# Altium PCB imu_sense.PcbDoc (part 1 of 2)
Units mil, origin at the board's own origin, x right, y up, seen from the top; angles counter-clockwise.
Board outline 2000 x 2000 mil, 2 copper layers (Top Layer, Bottom Layer); 188 components, 109 nets, 611 pads, 219 vias.
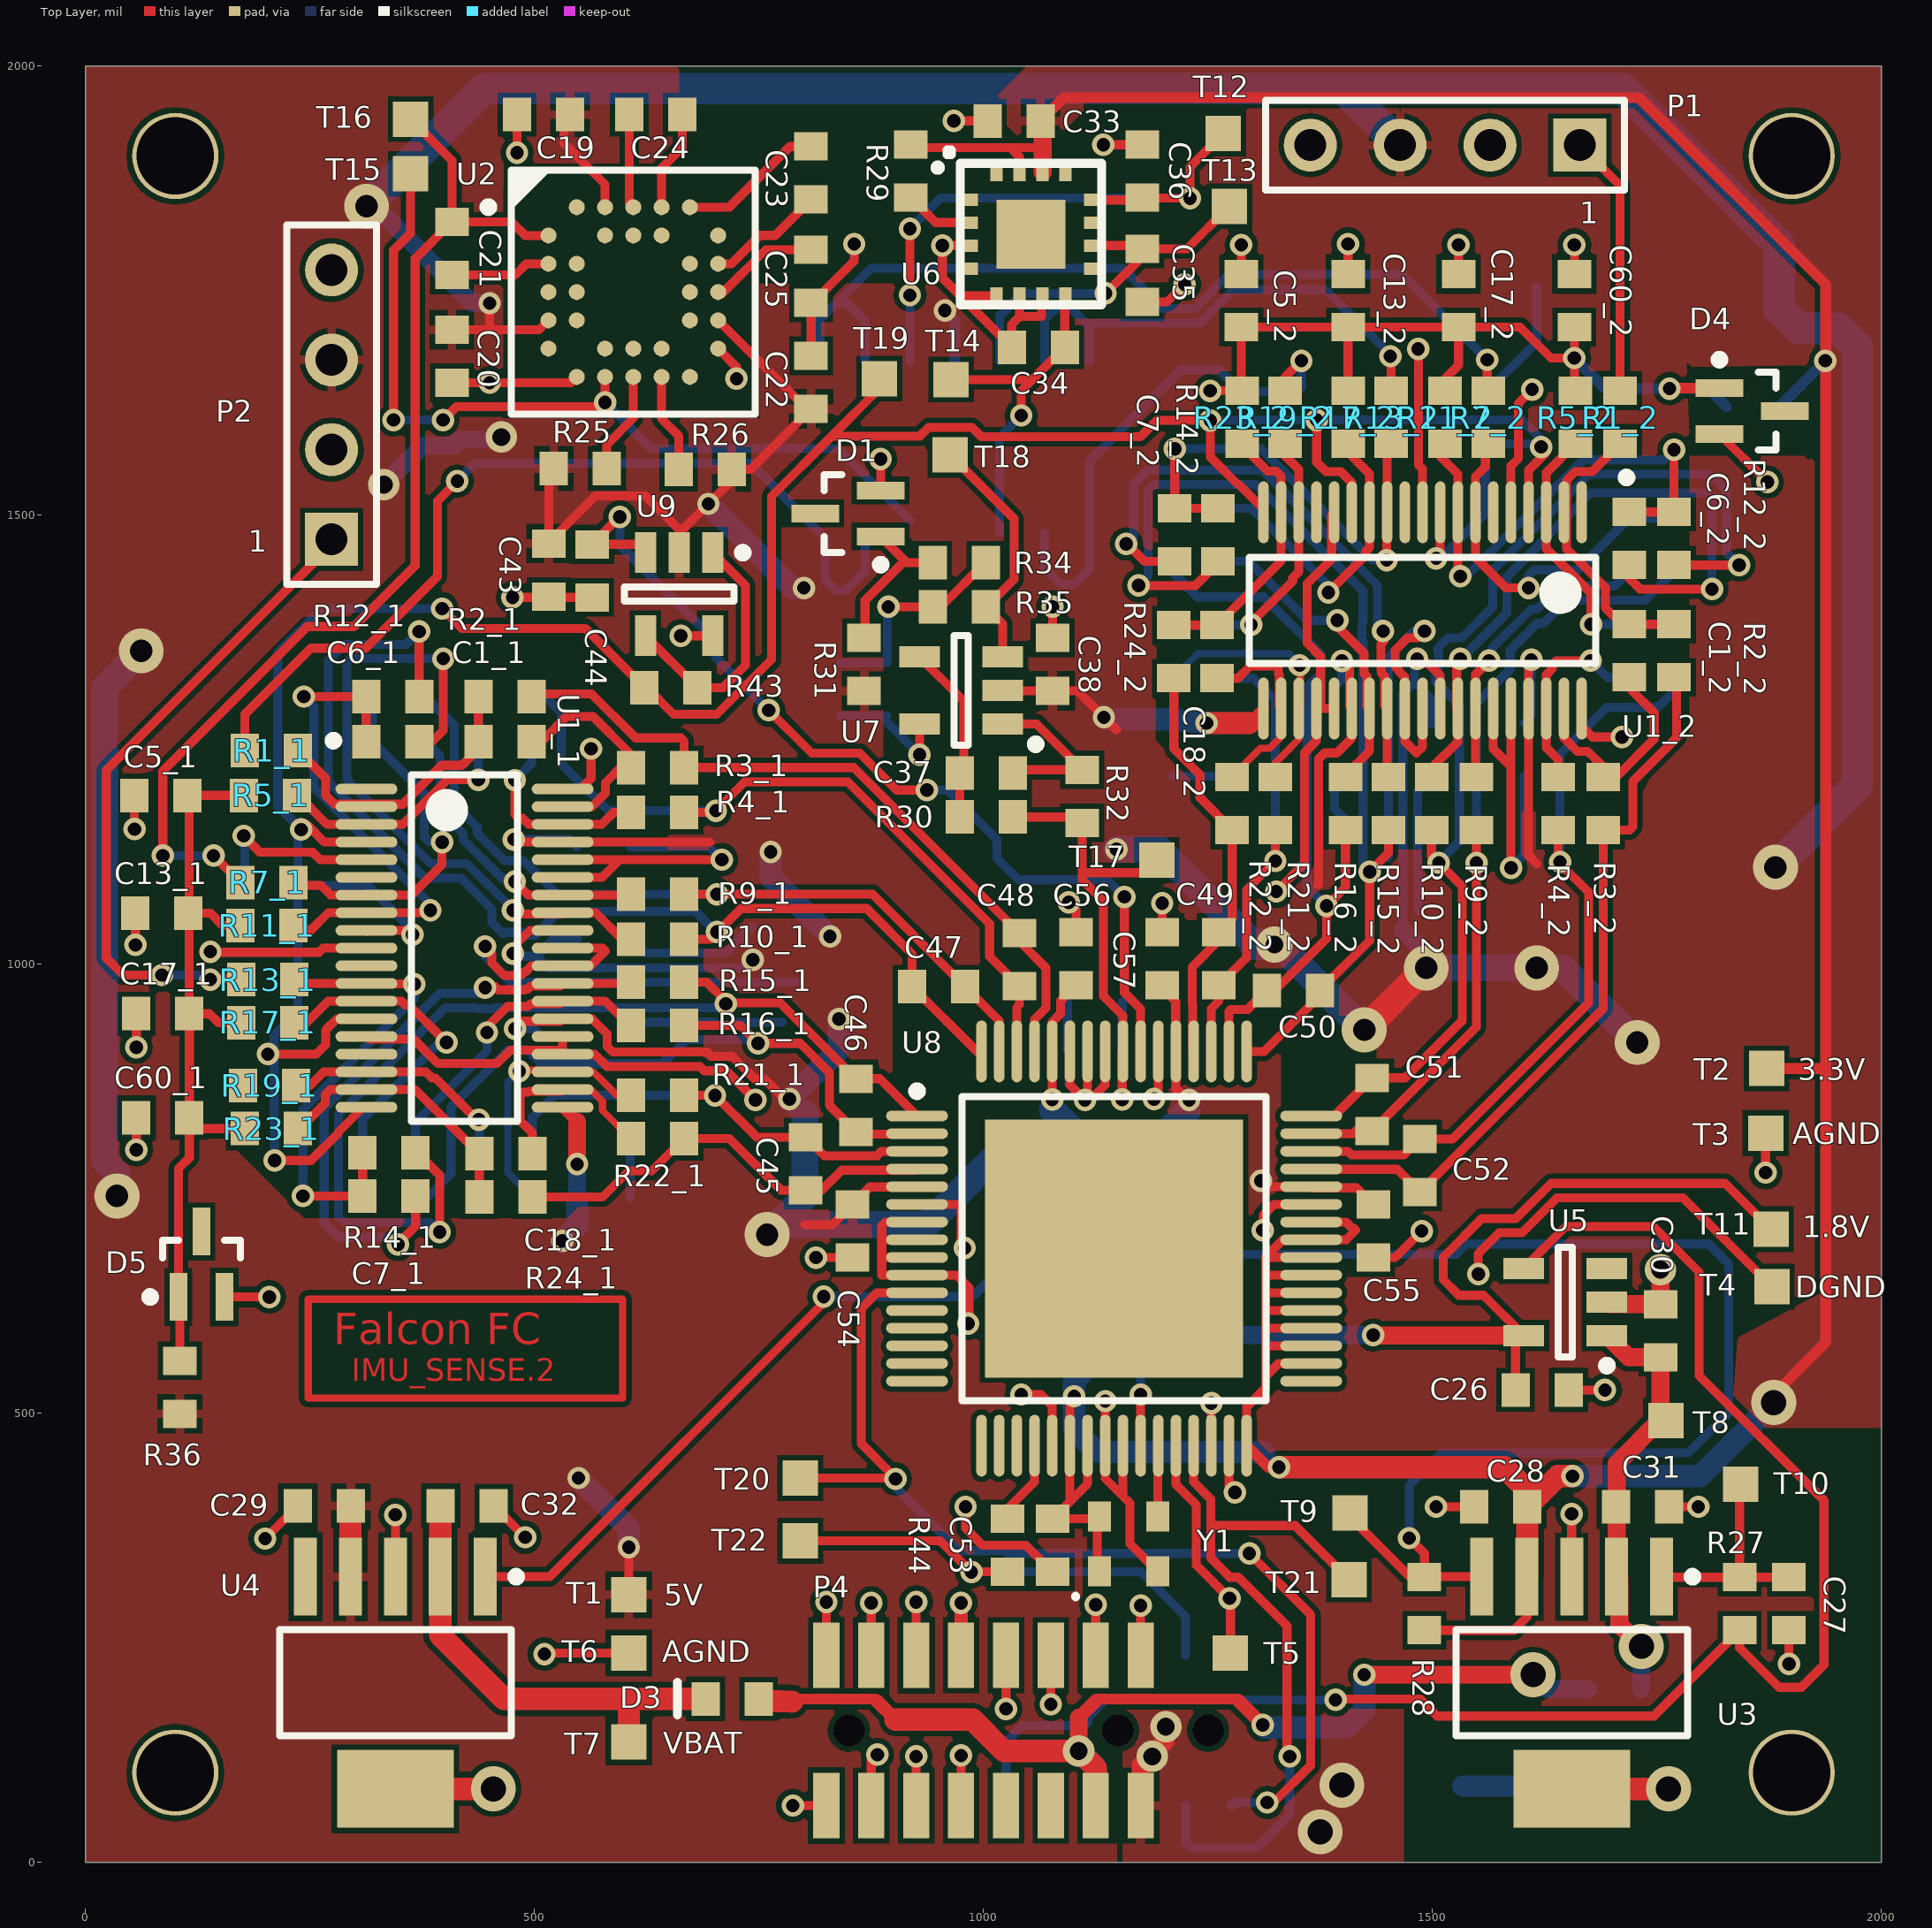
[diagram p0: Top Layer view]
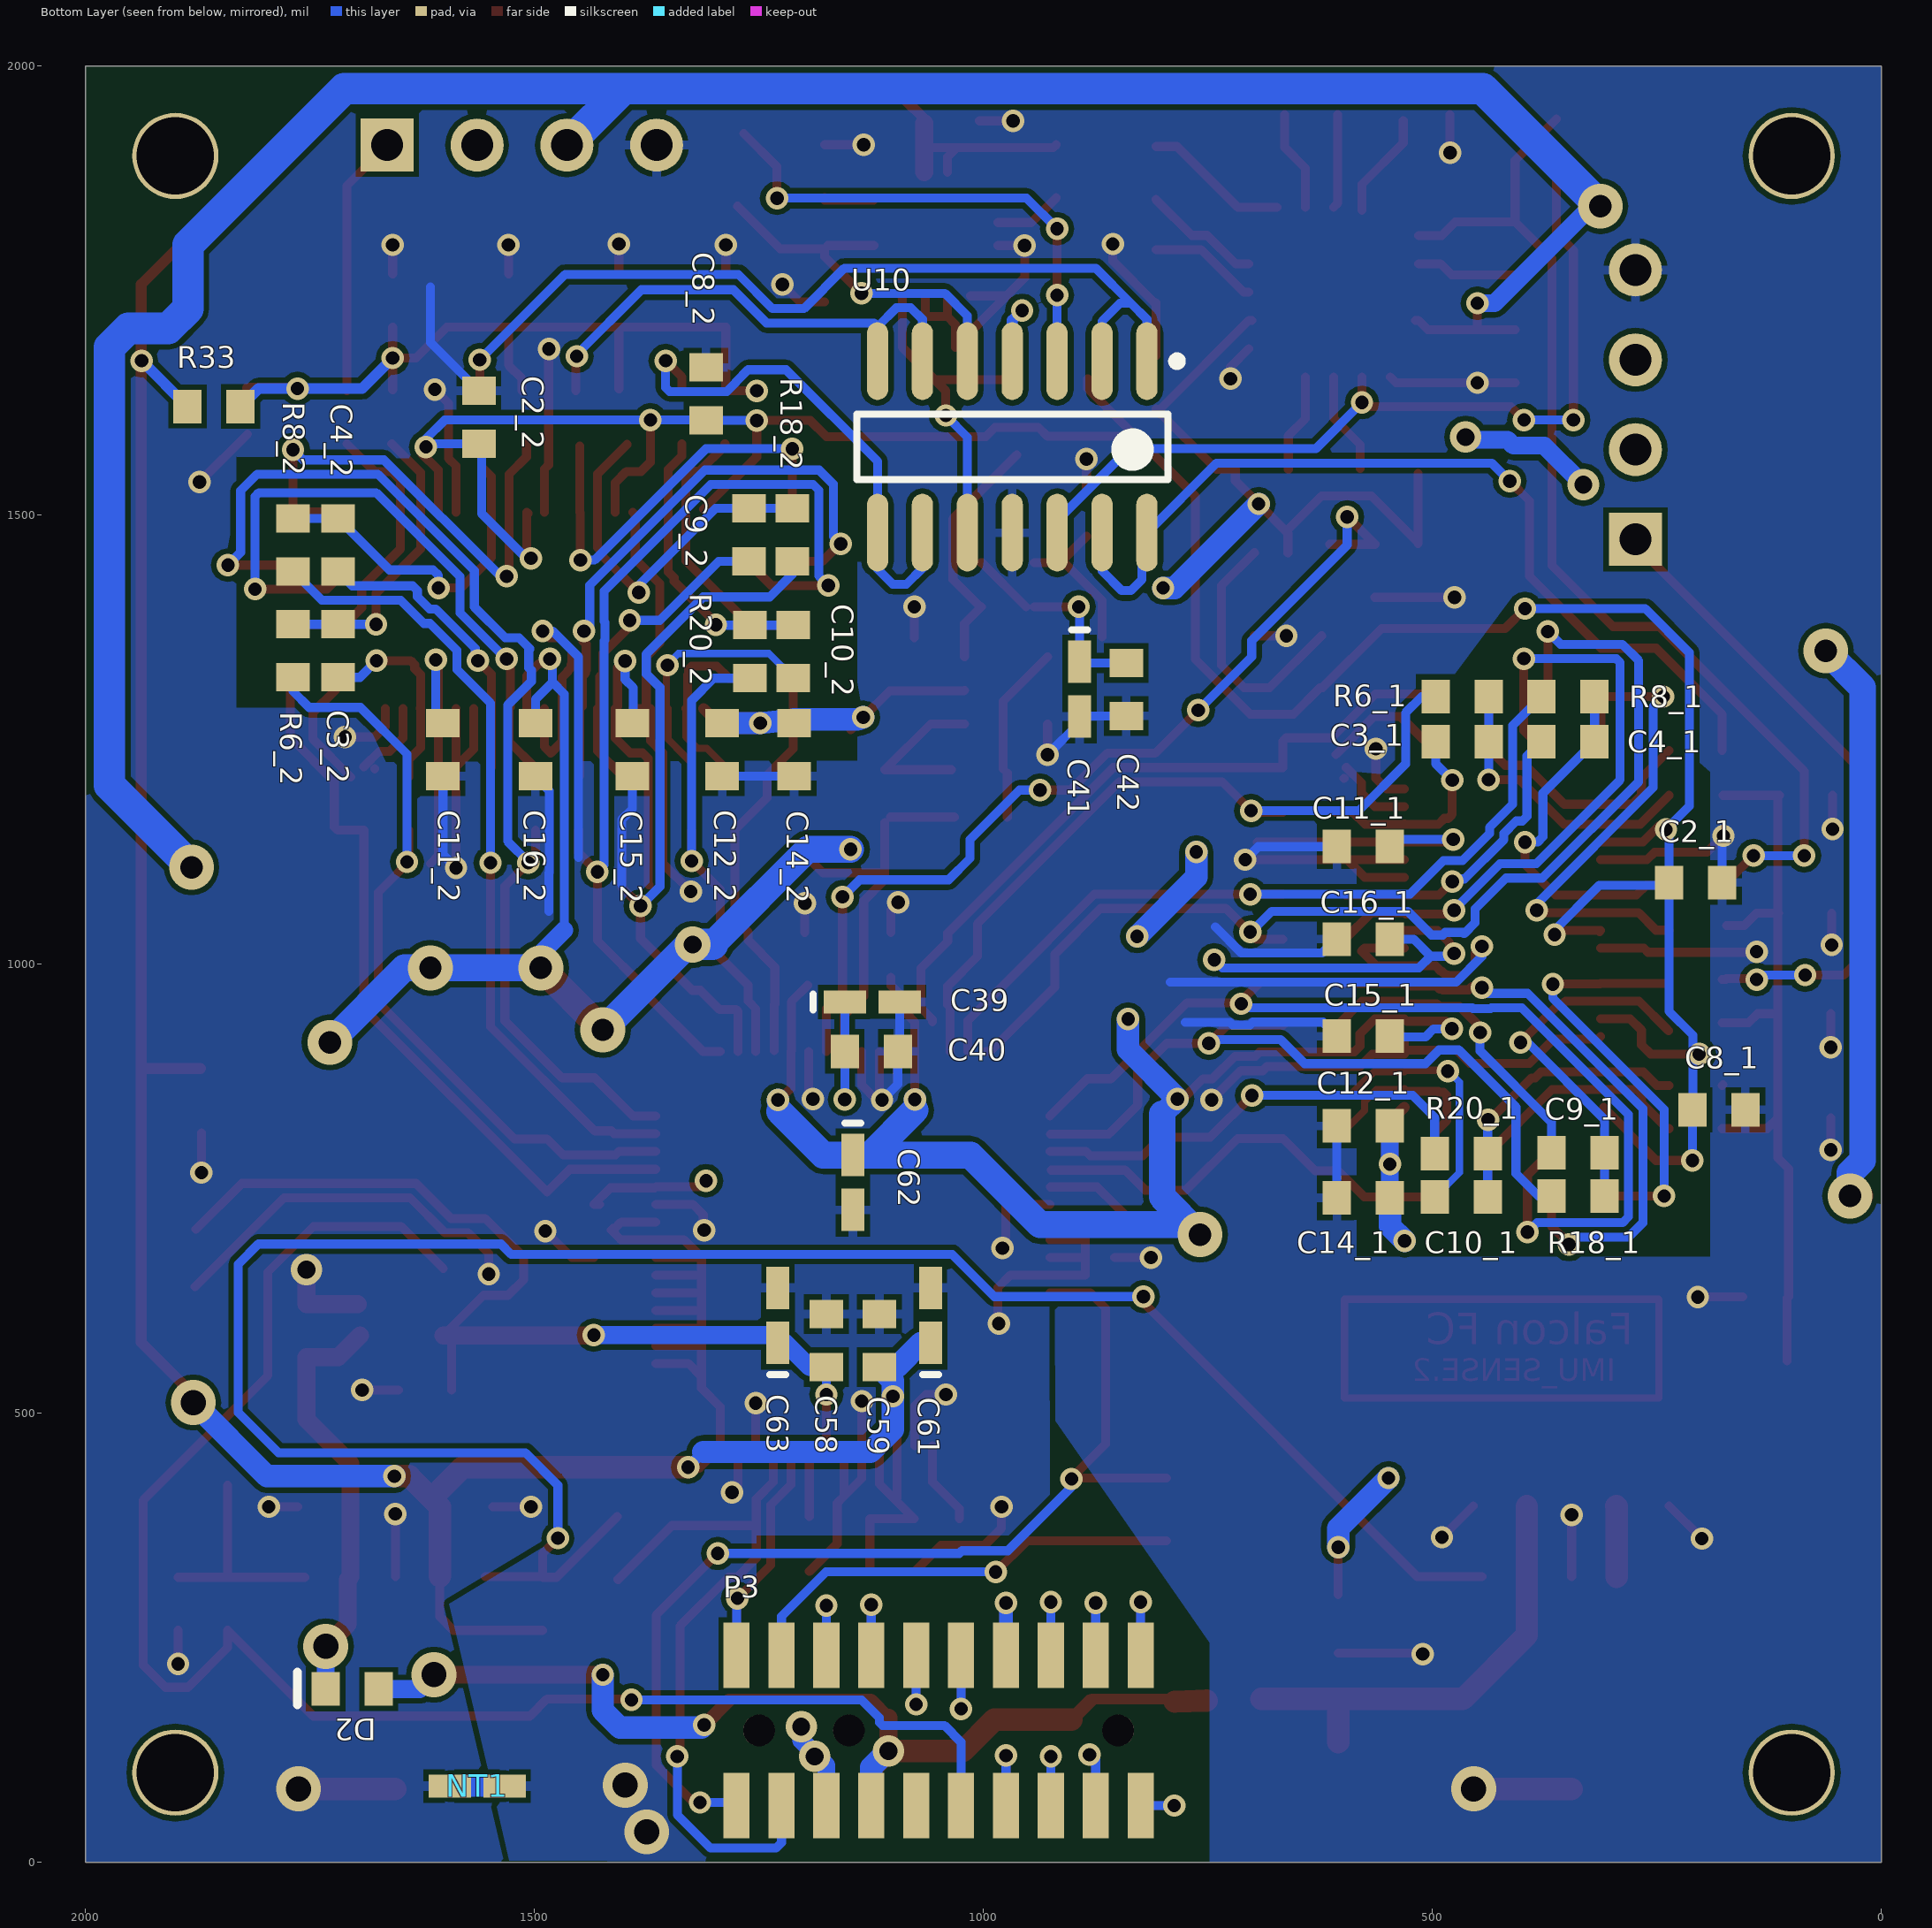
[diagram p1: Bottom Layer view, seen from below]

## Layer stack, top to bottom
Top Layer: signal copper 1.4
Dielectric: dielectric 12.6, FR-4, Dk 4.8
Bottom Layer: signal copper 1.4

## Board outline
0,0 2000,0 2000,2000 0,2000

## Design rules (kind name [scope] priority, off if disabled: settings)
Clearance [All] p1: gap=6
HoleSize [All] p1: absolutevalues=TRUE maxlimit=100 minlimit=15 maxpercent=80.000 minpercent=20.000
HoleToHoleClearance [All] p1: gap=6 allowstackedmicrovias=TRUE
PolygonConnect PolygonConnect_1 [IsVia] p1: connectstyle=Direct reliefconductorwidth=10 reliefentries=4 polygonreliefangle="90 Angle"
PolygonConnect [All] p2: connectstyle=Relief reliefconductorwidth=10 reliefentries=4 polygonreliefangle="90 Angle"
RoomDefinition 2 [InComponentClass('2')] p1: confinementstyle=ConfineIn formatcopy=TRUE lockcomponents=FALSE outline 1886,1788 1085,1788 1085,795 1886,795
RoomDefinition 1 [InComponentClass('1')] p2: confinementstyle=ConfineIn formatcopy=TRUE lockcomponents=FALSE outline 34,1412 34,609 1021,609 1021,1412
RoomDefinition imu_sense [InComponentClass('imu_sense')] p3: confinementstyle=ConfineIn formatcopy=TRUE lockcomponents=FALSE outline 0,0 2000,0 2000,2000 0,2000
RoomDefinition U_gyro [InComponentClass('U_gyro')] p4: confinementstyle=ConfineIn formatcopy=TRUE lockcomponents=TRUE outline 353,1433 904,1433 904,1992 353,1992
RoutingVias [All] p1: holewidth=15 width=25 viastyle="Through Hole" minholewidth=15 minwidth=25 maxholewidth=100 maxwidth=200
SilkToSilkClearance [All] p1: silktosilkclearance=1
SilkscreenOverComponentPads [All] p1: minsilkscreentomaskgap=1
SolderMaskExpansion SolderMaskExpansion_1 [IsVia] p1: expansion=-300
SolderMaskExpansion [All] p2: expansion=4
Width [All] p1: maxlimit=100 minlimit=6 preferedwidth=10
24 further rules are at their usual default settings.

## Classes and differential pairs
net class FLTR_IN_D[1..2]: FLTR_IN_D1 FLTR_IN_D2
net class FLTR_IN_C[1..2]: FLTR_IN_C1 FLTR_IN_C2
channel class differential_op_amps: 1 2
component class 2: C1_2 C2_2 C3_2 C4_2 C5_2 C6_2 C7_2 C8_2 C9_2 C10_2 C11_2 C12_2 C13_2 C14_2 C15_2 C16_2 C17_2 C18_2 C60_2 R1_2 R2_2 R3_2 R4_2 R5_2 R6_2 R7_2 R8_2 R9_2 R10_2 R11_2 R12_2 R13_2 R14_2 R15_2 R16_2 R17_2 R18_2 R19_2 R20_2 R21_2 R22_2 R23_2 R24_2 U1_2
component class 1: C1_1 C2_1 C3_1 C4_1 C5_1 C6_1 C7_1 C8_1 C9_1 C10_1 C11_1 C12_1 C13_1 C14_1 C15_1 C16_1 C17_1 C18_1 C60_1 R1_1 R2_1 R3_1 R4_1 R5_1 R6_1 R7_1 R8_1 R9_1 R10_1 R11_1 R12_1 R13_1 R14_1 R15_1 R16_1 R17_1 R18_1 R19_1 R20_1 R21_1 R22_1 R23_1 R24_1 U1_1
component class imu_sense: C26 C27 C28 C29 C30 C31 C32 C33 C34 C35 C36 C37 C38 C39 C40 C41 C42 C43 C44 C45 C46 C47 C48 C49 C50 C51 C52 C53 C54 C55 C56 C57 C58 C59 C61 C62 C63 D1 D2 D3 D4 D5 NT1 P1 P2 P3 P4 R27 R28 R29 R30 R31 R32 R33 R34 R35 R36 R43 R44 T1 T2 T3 T4 T5 T6 T7 T8 T9 T10 T11 T12 T13 T14 T15 T16 T17 T18 T19 T20 T21 T22 T? U3 U4 U5 U6 U7 U8 U9 U10 Y1
component class U_gyro: C19 C20 C21 C22 C23 C24 C25 R25 R26 U2
net class FLTR_IN_A[1..2]: FLTR_IN_A1 FLTR_IN_A2
net class FLTR_A_N[1..2]: FLTR_A_N1 FLTR_A_N2
net class FLTR_B_N[1..2]: FLTR_B_N1 FLTR_B_N2
net class FLTR_C_N[1..2]: FLTR_C_N1 FLTR_C_N2
net class FLTR_D_N[1..2]: FLTR_D_N1 FLTR_D_N2
net class FLTR_A_P[1..2]: FLTR_A_P1 FLTR_A_P2
net class FLTR_B_P[1..2]: FLTR_B_P1 FLTR_B_P2
net class FLTR_C_P[1..2]: FLTR_C_P1 FLTR_C_P2
net class FLTR_D_P[1..2]: FLTR_D_P1 FLTR_D_P2
net class FLTR_IN_B[1..2]: FLTR_IN_B1 FLTR_IN_B2

## Components (designator, comment, footprint, x,y, rotation, side; value= is the part's Value field where it differs from the comment)
C1_1 "Capacitor" "0603 (1608)" 467,1248 r180 top (schematic designator C1)
C1_2 "Capacitor" "0603 (1608)" 1719,1349 r90 top (schematic designator C1)
C2_1 "Capacitor" "0603 (1608)" 207,1091 r0 bottom (schematic designator C2)
C2_2 "Capacitor" "0603 (1608)" 1562,1609 r270 bottom (schematic designator C2)
C3_1 "Capacitor" "0603 (1608)" 467,1248 r180 bottom (schematic designator C3)
C3_2 "Capacitor" "0603 (1608)" 1719,1349 r90 bottom (schematic designator C3)
C4_1 "Capacitor" "0603 (1608)" 349,1248 r180 bottom (schematic designator C4)
C4_2 "Capacitor" "0603 (1608)" 1719,1467 r90 bottom (schematic designator C4)
C5_1 "Capacitor" "0603 (1608)" 84,1188 r0 top (schematic designator C5)
C5_2 "Capacitor" "0603 (1608)" 1287,1739 r270 top (schematic designator C5)
C6_1 "Capacitor" "0603 (1608)" 342,1248 r180 top (schematic designator C6)
C6_2 "Capacitor" "0603 (1608)" 1719,1474 r90 top (schematic designator C6)
C7_1 "Capacitor" "0603 (1608)" 338,742 r180 top (schematic designator C7)
C7_2 "Capacitor" "0603 (1608)" 1213,1478 r90 top (schematic designator C7)
C8_1 "Capacitor" "0603 (1608)" 181,838 r0 bottom (schematic designator C8)
C8_2 "Capacitor" "0603 (1608)" 1309,1635 r270 bottom (schematic designator C8)
C9_1 "Capacitor" "0603 (1608)" 338,790 r180 bottom (schematic designator C9)
C9_2 "Capacitor" "0603 (1608)" 1261,1478 r90 bottom (schematic designator C9)
C10_1 "Capacitor" "0603 (1608)" 468,741 r180 bottom (schematic designator C10)
C10_2 "Capacitor" "0603 (1608)" 1212,1348 r90 bottom (schematic designator C10)
C11_1 "Capacitor" "0603 (1608)" 577,1131 r0 bottom (schematic designator C11)
C11_2 "Capacitor" "0603 (1608)" 1602,1239 r270 bottom (schematic designator C11)
C12_1 "Capacitor" "0603 (1608)" 577,820 r0 bottom (schematic designator C12)
C12_2 "Capacitor" "0603 (1608)" 1291,1239 r270 bottom (schematic designator C12)
C13_1 "Capacitor" "0603 (1608)" 85,1057 r180 top (schematic designator C13)
C13_2 "Capacitor" "0603 (1608)" 1406,1739 r90 top (schematic designator C13)
C14_1 "Capacitor" "0603 (1608)" 577,740 r0 bottom (schematic designator C14)
C14_2 "Capacitor" "0603 (1608)" 1211,1239 r270 bottom (schematic designator C14)
C15_1 "Capacitor" "0603 (1608)" 577,920 r0 bottom (schematic designator C15)
C15_2 "Capacitor" "0603 (1608)" 1391,1239 r270 bottom (schematic designator C15)
C16_1 "Capacitor" "0603 (1608)" 577,1028 r0 bottom (schematic designator C16)
C16_2 "Capacitor" "0603 (1608)" 1499,1239 r270 bottom (schematic designator C16)
C17_1 "Capacitor" "0603 (1608)" 86,945 r180 top (schematic designator C17)
C17_2 "Capacitor" "0603 (1608)" 1529,1739 r90 top (schematic designator C17)
C18_1 "Capacitor" "0603 (1608)" 468,789 r180 top (schematic designator C18)
C18_2 "Capacitor" "0603 (1608)" 1260,1348 r90 top (schematic designator C18)
C19 "Capacitor" "0603 (1608)" 510,1946 r180 top
C20 "Capacitor" "0603 (1608)" 408,1677 r270 top
C21 "Capacitor" "0603 (1608)" 408,1797 r90 top
C22 "Capacitor" "0603 (1608)" 808,1648 r90 top
C23 "Capacitor" "0603 (1608)" 808,1881 r270 top
C24 "Capacitor" "0603 (1608)" 635,1946 r0 top
C25 "Capacitor" "0603 (1608)" 808,1766 r270 top
C26 "1uF" "0603 (1608)" 1622,526 r0 top
C27 "Capacitor" "0603 (1608)" 1897,288 r270 top
C28 "10uF" "0603 (1608)" 1576,396 r180 top
C29 "10uF" "0603 (1608)" 266,397 r180 top
C30 "1uF" "0603 (1608)" 1754,592 r90 top
C31 "Capacitor" "0603 (1608)" 1734,396 r0 top
C32 "Capacitor" "0603 (1608)" 425,397 r0 top
C33 "Capacitor" "0603 (1608)" 1034,1939 r180 top
C34 "10nF" "0603 (1608)" 1061,1687 r0 top
C35 "10nF" "0603 (1608)" 1177,1767 r90 top
C36 "10nF" "0603 (1608)" 1177,1883 r270 top
C37 "Capacitor" "0603 (1608)" 1003,1213 r0 top
C38 "10nF" "0603 (1608)" 1077,1334 r270 top
C39 "tant" "CAP-POL 0603(1608)" 1124,958 r180 bottom
C40 "Capacitor" "0603 (1608)" 1125,903 r180 bottom
C41 "tant" "CAP-POL 0603(1608)" 893,1306.49 r270 bottom
C42 "Capacitor" "0603 (1608)" 841,1306 r270 bottom
C43 "10nF" "0603 (1608)" 516,1439 r90 top
C44 "Capacitor" "0603 (1608)" 564,1438 r270 top
C45 "Capacitor" "0603 (1608)" 802,778 r270 top
C46 "Capacitor" "0603 (1608)" 858,843 r270 top
C47 "Capacitor" "0603 (1608)" 950,975 r180 top
C48 "Capacitor" "0603 (1608)" 1040,1005 r270 top
C49 "Capacitor" "0603 (1608)" 1262,1006 r90 top
C50 "Capacitor" "0603 (1608)" 1345,971 r180 top
C51 "Capacitor" "0603 (1608)" 1433,844 r90 top
C52 "Capacitor" "0603 (1608)" 1486,776 r90 top
C53 "10nF" "0603 (1608)" 1077,353 r90 top
C54 "Capacitor" "0603 (1608)" 854,703 r270 top
C55 "Capacitor" "0603 (1608)" 1434,703 r270 top
C56 "Capacitor" "0603 (1608)" 1103,1006 r90 top
C57 "Capacitor" "0603 (1608)" 1199,1006 r90 top
C58 "Capacitor" "0603 (1608)" 1175,581 r90 bottom
C59 "Capacitor" "0603 (1608)" 1116,581 r90 bottom
C60_1 "Capacitor" "0603 (1608)" 86,829 r180 top (schematic designator C60)
C60_2 "Capacitor" "0603 (1608)" 1658,1739 r90 top (schematic designator C60)
C61 "tant" "CAP-POL 0603(1608)" 1059,609 r90 bottom
C62 "tant" "CAP-POL 0603(1608)" 1145.42,757 r270 bottom
C63 "tant" "CAP-POL 0603(1608)" 1229,609 r90 bottom
D1 "2.5V Ref" SC-70 849,1502 r180 top
D2 "Diode" "0603(1608) diode - line on pin2" 1703,193 r0 bottom
D3 "Diode" "0603(1608) diode - line on pin2" 720,182 r180 top
D4 "2.5V Ref" SC-70 1856,1616 r0 top
D5 "2.5V Ref" SC-70 129,666 r90 top
NT1 "Net Tie" NET_TIE 1564,85 r0 bottom net-tie
P1 "Header 4" "gyro mount" 1506,1914 r90 top
P2 "Header 4" "gyro mount" 276,1631 r0 top
P3 "MHDR2X10" S9013E-10-ND 1050,147 r0 bottom locked
P4 "2x8smd0.5male" "Header, right hole" 1000,147 r0 top locked
R1_1 "931 1%" "0603 (1608)" 207,1238 r0 top (schematic designator R1)
R1_2 "931 1%" "0603 (1608)" 1709,1609 r270 top (schematic designator R1)
R2_1 "931 1%" "0603 (1608)" 467,1298 r0 top (schematic designator R2)
R2_2 "931 1%" "0603 (1608)" 1769,1349 r270 top (schematic designator R2)
R3_1 "931 1%" "0603 (1608)" 637,1219 r0 top (schematic designator R3)
R3_2 "931 1%" "0603 (1608)" 1690,1179 r270 top (schematic designator R3)
R4_1 "931 1%" "0603 (1608)" 637,1169 r0 top (schematic designator R4)
R4_2 "931 1%" "0603 (1608)" 1640,1179 r270 top (schematic designator R4)
R5_1 "931 1%" "0603 (1608)" 206,1188 r0 top (schematic designator R5)
R5_2 "931 1%" "0603 (1608)" 1659,1609 r270 top (schematic designator R5)
R6_1 "931 1%" "0603 (1608)" 467,1298 r0 bottom (schematic designator R6)
R6_2 "931 1%" "0603 (1608)" 1769,1349 r270 bottom (schematic designator R6)
R7_1 "931 1%" "0603 (1608)" 202,1091 r0 top (schematic designator R7)
R7_2 "931 1%" "0603 (1608)" 1562,1609 r270 top (schematic designator R7)
R8_1 "931 1%" "0603 (1608)" 349,1298 r0 bottom (schematic designator R8)
R8_2 "931 1%" "0603 (1608)" 1769,1467 r270 bottom (schematic designator R8)
R9_1 "931 1%" "0603 (1608)" 637,1078 r0 top (schematic designator R9)
R9_2 "931 1%" "0603 (1608)" 1549,1179 r270 top (schematic designator R9)
R10_1 "931 1%" "0603 (1608)" 637,1028 r0 top (schematic designator R10)
R10_2 "931 1%" "0603 (1608)" 1499,1179 r270 top (schematic designator R10)
R11_1 "931 1%" "0603 (1608)" 202,1043 r0 top (schematic designator R11)
R11_2 "931 1%" "0603 (1608)" 1514,1609 r270 top (schematic designator R11)
R12_1 "931 1%" "0603 (1608)" 342,1298 r0 top (schematic designator R12)
R12_2 "931 1%" "0603 (1608)" 1769,1474 r270 top (schematic designator R12)
R13_1 "931 1%" "0603 (1608)" 203,983 r0 top (schematic designator R13)
R13_2 "931 1%" "0603 (1608)" 1454,1609 r270 top (schematic designator R13)
R14_1 "931 1%" "0603 (1608)" 338,790 r0 top (schematic designator R14)
R14_2 "931 1%" "0603 (1608)" 1261,1478 r270 top (schematic designator R14)
R15_1 "931 1%" "0603 (1608)" 637,980 r0 top (schematic designator R15)
R15_2 "931 1%" "0603 (1608)" 1451,1179 r270 top (schematic designator R15)
R16_1 "931 1%" "0603 (1608)" 637,932 r0 top (schematic designator R16)
R16_2 "931 1%" "0603 (1608)" 1403,1179 r270 top (schematic designator R16)
R17_1 "931 1%" "0603 (1608)" 203,935 r0 top (schematic designator R17)
R17_2 "931 1%" "0603 (1608)" 1406,1609 r270 top (schematic designator R17)
R18_1 "931 1%" "0603 (1608)" 338,742 r0 bottom (schematic designator R18)
R18_2 "931 1%" "0603 (1608)" 1213,1478 r270 bottom (schematic designator R18)
R19_1 "931 1%" "0603 (1608)" 205,865 r0 top (schematic designator R19)
R19_2 "931 1%" "0603 (1608)" 1336,1609 r270 top (schematic designator R19)
R20_1 "931 1%" "0603 (1608)" 468,789 r0 bottom (schematic designator R20)
R20_2 "931 1%" "0603 (1608)" 1260,1348 r270 bottom (schematic designator R20)
R21_1 "931 1%" "0603 (1608)" 637,854 r0 top (schematic designator R21)
R21_2 "931 1%" "0603 (1608)" 1325,1179 r270 top (schematic designator R21)
R22_1 "931 1%" "0603 (1608)" 637,806 r0 top (schematic designator R22)
R22_2 "931 1%" "0603 (1608)" 1277,1179 r270 top (schematic designator R22)
R23_1 "931 1%" "0603 (1608)" 207,817 r0 top (schematic designator R23)
R23_2 "931 1%" "0603 (1608)" 1288,1609 r270 top (schematic designator R23)
R24_1 "931 1%" "0603 (1608)" 468,741 r0 top (schematic designator R24)
R24_2 "931 1%" "0603 (1608)" 1212,1348 r270 top (schematic designator R24)
R25 "ST Jumper" "0603 (1608)" 551,1552 r180 top
R26 "ST Jumper" "0603 (1608)" 690,1551 r0 top
R27 "200" "0603 (1608)" 1842,288 r90 top
R28 "20K" "0603 (1608)" 1491,288 r90 top
R29 "ST Jumper" "0603 (1608)" 919,1883 r270 top
R30 "1K" "0603 (1608)" 1003,1164 r0 top
R31 "20K" "0603 (1608)" 867,1334 r270 top
R32 "100" "0603 (1608)" 1110,1187 r270 top
R33 "200" "0603 (1608)" 1857,1621 r180 bottom
R34 "1K" "0603 (1608)" 973,1447 r0 top
R35 "100" "0603 (1608)" 973,1398 r0 top
R36 "200" "0603 (1608)" 105,529 r90 top
R43 "100" "0603 (1608)" 652,1308 r180 top
R44 "931 1%" "0603 (1608)" 1027,353 r270 top
T1 "TEST_PAD" TEST_PAD 605,298 r0 top
T2 "TEST_PAD" TEST_PAD 1872,884 r0 top
T3 "AGND" TEST_PAD 1871,812 r0 top
T4 "TEST_PAD" TEST_PAD 1878,641 r0 top
T5 "TEST_PAD" TEST_PAD 1275,233 r0 top
T6 "TEST_PAD" TEST_PAD 605,233 r0 top
T7 "VBAT" TEST_PAD 605,134 r0 top
T8 "TEST_PAD" TEST_PAD 1760,492 r0 top
T9 "TEST_PAD" TEST_PAD 1408,389 r0 top
T10 "TEST_PAD" TEST_PAD 1843,421 r90 top
T11 "TEST_PAD" TEST_PAD 1877,705 r90 top
T12 "" TEST_PAD 1267,1925 r90 top
T13 "" TEST_PAD 1274,1844 r90 top
T14 "" TEST_PAD 964,1651 r90 top
T15 "" TEST_PAD 362,1880 r90 top
T16 "" TEST_PAD 362,1941 r90 top
T17 "" TEST_PAD 1193,1116 r90 top
T18 "" TEST_PAD 963,1567 r90 top
T19 "" TEST_PAD 884,1652 r90 top
T20 "" TEST_PAD 796,428 r90 top
T21 "" TEST_PAD 1407,315 r90 top
T22 "TEST_PAD" TEST_PAD 796,358 r90 top
U1_1 "THS4524" TSSOP-38 422,1018 r0 top (schematic designator U1)
U1_2 "THS4524" TSSOP-38 1489,1394 r270 top (schematic designator U1)
U2 "ADXRS620" BGA_AXDR 610.01,1748.5 r0 top
U3 "3.3V Reg MCP1791T-3302E" "SOT223 - 5 leads + tab" 1655,200 r270 top locked
U4 "5V Reg - MCP1791T-5002E" "SOT223 - 5 leads + tab" 345,200 r270 top locked
U5 "1.8V Reg MCP1804" "SOT23-5 - MCP1804T" 1648,624 r180 top
U6 "ADXL325" LFCSP_LQ_AXDL 1053,1813 r0 top
U7 "TLV2731" "SOT23-5 Ti Op Amp" 975,1305 r180 top
U8 "ADS1178/1278" S-PQFP-G64 1145.42,683.49 r0 top
U9 "TLV2731" "SOT23-5 Ti Op Amp" 661,1412 r270 top
U10 "OPA4348" TSSOP-14 968,1576 r270 bottom
Y1 "OSCILLATOR" "ABRACON Oscillator" 1129,323.98 r0 top

## Footprints (in the part's own frame and the unit in brackets; to place one, negate y for a bottom-side part, rotate by r counter-clockwise, add the part's x,y. Pads: shape width x height; smd on the part's side, far side on the other; paste and mask are expansions set on the pad)
"0603 (1608)" [mm] "Chip 2-Leads 0603 (1608)"
  rect 0.8x0.95 smd mask+0: 1(-0.75,0) 2(0.75,0)
  body extent -0.77,-0.43 0.77,0.43, height 0.55
"0603(1608) diode - line on pin2" [mm]
  rect 0.8x0.95 smd mask+0: 1(-0.75,0) 2(0.75,0)
  silkscreen extent 1.55,-0.48 1.55,0.45, body extent -0.77,-0.43 0.77,0.43, height 0.55
"ABRACON Oscillator" [mm]
  rect 0.65x0.85 smd: 1(0,0) 2(1.65,0) 3(1.65,1.55) 4(0,1.55)
  silkscreen extent -0.68,-0.71 -0.67,-0.7, body extent -0.48,-0.36 2.2,1.91, height 0.85
BGA_AXDR [mm] "From AXDRS622 Datasheet"
  round 0.45 smd: A2(-1.6,2.4) A3(-0.8,2.4) A4(0,2.4) A5(0.8,2.4) A6(1.6,2.4) B1(-2.4,1.6) B3(-0.8,1.6) B4(0,1.6) B5(0.8,1.6) B7(2.4,1.6) C1(-2.4,0.8) C2(-1.6,0.8) C6(1.6,0.8) C7(2.4,0.8) D1(-2.4,0) D2(-1.6,0) D6(1.6,0) D7(2.4,0) E1(-2.4,-0.8) E2(-1.6,-0.8) E6(1.6,-0.8) E7(2.4,-0.8) F1(-2.4,-1.6) F3(-0.8,-1.6) F4(0,-1.6) F5(0.8,-1.6) F7(2.4,-1.6) G2(-1.6,-2.4) G3(-0.8,-2.4) G4(0,-2.4) G5(0.8,-2.4) G6(1.6,-2.4)
  silkscreen extent -4.22,-3.45 3.45,3.45, body extent -3.45,-3.45 3.45,3.45, height 3.8
"CAP-POL 0603(1608)" [mm] "Molded Capacitor, 2-Leads, Body 1.6x0.8mm, IPC Medium Density"
  rect 1.2x0.65 smd: 1(-0.775,0) 2(0.775,0)
  silkscreen extent -1.67,-0.22 -1.67,0.22, body extent -0.85,-0.48 0.85,0.48, height 0.9
"gyro mount" [mm] "100 mil header for mounting gyro board to imu"
  rect 1.5x1.5 hole 0.9 mask+0.1: 1(-0.051,-4.013)
  round 1.5 hole 0.9 mask+0.1: 2(-0.051,-1.473) 3(-0.051,1.067) 4(-0.051,3.607)
  silkscreen extent -1.32,-5.28 1.22,4.88, body extent -6.28,-6.1 1.12,5.75, height 13.27
"Header, right hole" [mm]
  round 0.889 hole 0.9 unplated: 0(3.81,0)
  rect 0.74x1.85 smd: 1(-4.445,2.125) 2(-4.445,-2.125) 3(-3.175,2.125) 4(-3.175,-2.125) 5(-1.905,2.125) 6(-1.905,-2.125) 7(-0.635,2.125) 8(-0.635,-2.125) 9(0.635,2.125) 10(0.635,-2.125) 11(1.905,2.125) 12(1.905,-2.125) 13(3.175,2.125) 14(3.175,-2.125) 15(4.445,2.125) 16(4.445,-2.125)
LFCSP_LQ_AXDL [mm]
  rect 0.5x0.35 smd mask+0.102: 1(-1.75,0.975) 2(-1.75,0.325) 3(-1.75,-0.325) 4(-1.75,-0.975) 9(1.75,-0.975) 10(1.75,-0.325) 11(1.75,0.325) 12(1.75,0.975)
  rect 0.35x0.5 smd mask+0.102: 5(-0.975,-1.75) 6(-0.325,-1.75) 7(0.325,-1.75) 8(0.975,-1.75) 13(0.975,1.75) 14(0.325,1.75) 15(-0.325,1.75) 16(-0.975,1.75)
  rect 1.95x1.95 smd: PAD(0,0)
  silkscreen extent -2.37,-2 2,2.37
NET_TIE [mm] "Used to connect 2 nets"
  rect 1.2x0.65 smd paste+0: 1(-0.775,0)
  rect 1.2x0.65 smd: 2(0.775,0)
  Top Layer lines w0.6: -0.775,0 0.775,0
S9013E-10-ND [mm] "20-POS Header SMD"
  round 0.889 hole 0.9 unplated: 0(-5.08,0) 0(5.08,0)
  rect 0.74x1.85 smd: 1(-5.715,2.125) 2(-5.715,-2.125) 3(-4.445,2.125) 4(-4.445,-2.125) 5(-3.175,2.125) 6(-3.175,-2.125) 7(-1.905,2.125) 8(-1.905,-2.125) 9(-0.635,2.125) 10(-0.635,-2.125) 11(0.635,2.125) 12(0.635,-2.125) 13(1.905,2.125) 14(1.905,-2.125) 15(3.175,2.125) 16(3.175,-2.125) 17(4.445,2.125) 18(4.445,-2.125) 19(5.715,2.125) 20(5.715,-2.125)
S-PQFP-G64 [mm] "ADS1178 Footprint"
  oval 1.75x0.3 smd: 1(-5.575,3.75) 2(-5.575,3.25) 3(-5.575,2.75) 4(-5.575,2.25) 5(-5.575,1.75) 6(-5.575,1.25) 7(-5.575,0.75) 8(-5.575,0.25) 9(-5.575,-0.25) 10(-5.575,-0.75) 11(-5.575,-1.25) 12(-5.575,-1.75) 13(-5.575,-2.25) 14(-5.575,-2.75) 15(-5.575,-3.25) 16(-5.575,-3.75) 33(5.575,-3.75) 34(5.575,-3.25) 35(5.575,-2.75) 36(5.575,-2.25) 37(5.575,-1.75) 38(5.575,-1.25) 39(5.575,-0.75) 40(5.575,-0.25) 41(5.575,0.25) 42(5.575,0.75) 43(5.575,1.25) 44(5.575,1.75) 45(5.575,2.25) 46(5.575,2.75) 47(5.575,3.25) 48(5.575,3.75)
  oval 0.3x1.75 smd: 17(-3.75,-5.575) 18(-3.25,-5.575) 19(-2.75,-5.575) 20(-2.25,-5.575) 21(-1.75,-5.575) 22(-1.25,-5.575) 23(-0.75,-5.575) 24(-0.25,-5.575) 25(0.25,-5.575) 26(0.75,-5.575) 27(1.25,-5.575) 28(1.75,-5.575) 29(2.25,-5.575) 30(2.75,-5.575) 31(3.25,-5.575) 32(3.75,-5.575) 49(3.75,5.575) 50(3.25,5.575) 51(2.75,5.575) 52(2.25,5.575) 53(1.75,5.575) 54(1.25,5.575) 55(0.75,5.575) 56(0.25,5.575) 57(-0.25,5.575) 58(-0.75,5.575) 59(-1.25,5.575) 60(-1.75,5.575) 61(-2.25,5.575) 62(-2.75,5.575) 63(-3.25,5.575) 64(-3.75,5.575)
  rect 7.3x7.3 smd: 65(0,0)
  silkscreen extent -5.7,-4.3 4.3,4.57, body extent -5,-5 5,5, height 1.2
SC-70 [mm] "SC-70, for ADR525BKSZ-REEL7CT-ND zener reference 3-Leads, Body 2.2x2.4mm (max), Pitch 0.65mm, IPC Medium Density"
  rect 1.35x0.5 smd: 1(-0.925,0.65) 2(-0.925,-0.65) 3(0.925,0)
  silkscreen extent -1.05,-1.1 0.67,1.57, body extent -0.67,-1.1 0.67,1.1, height 1
"SOT23-5 - MCP1804T" [mm] "SOT23, 5-Leads, Body 3.1x3.2mm (max), Pitch 0.95mm, IPC Medium Density"
  rect 1.15x0.6 smd: 1(-1.175,0.95) 2(-1.175,0) 3(-1.175,-0.95) 4(1.175,-0.95) 5(1.175,0.95)
  silkscreen extent -1.3,-1.55 0.2,1.92, body extent -0.9,-1.55 0.9,1.55, height 1.45
"SOT23-5 Ti Op Amp" [mm] "296-10656-1-ND    SOT23, 5-Leads, Body 3.1x3.0mm (max), Pitch 0.95mm, IPC Medium Density"
  rect 1.15x0.6 smd: 1(-1.175,0.95) 2(-1.175,0) 3(-1.175,-0.95) 4(1.175,-0.95) 5(1.175,0.95)
  silkscreen extent -2.24,-1.55 0.2,1.65, body extent -0.9,-1.55 0.9,1.55, height 1.3
"SOT223 - 5 leads + tab" [mm] "MCP1791T-5002E/DCCT-ND Body 6.6x7.3mm (max), Pitch 1.27mm, IPC Medium Density"
  rect 2.2x0.65 smd: 1(-3,2.54) 2(-3,1.27) 3(-3,0) 4(-3,-1.27) 5(-3,-2.54)
  rect 2.2x3.3 smd: 6(3,0)
  silkscreen extent -3.12,-3.27 1.5,3.54, body extent -1.78,-3.27 1.78,3.27, height 1.8
TEST_PAD [mm]
  rect 1x1 smd: 0(0,0)
TSSOP-14 [mm] "SOP, 14-Leads, Body 8.8x4.0mm (max), Pitch 1.27mm, IPC Medium Density"
  oval 2.2x0.6 smd: 1(-2.425,3.81) 2(-2.425,2.54) 3(-2.425,1.27) 4(-2.425,0) 5(-2.425,-1.27) 6(-2.425,-2.54) 7(-2.425,-3.81) 8(2.425,-3.81) 9(2.425,-2.54) 10(2.425,-1.27) 11(2.425,0) 12(2.425,1.27) 13(2.425,2.54) 14(2.425,3.81)
  silkscreen extent -2.55,-4.4 0.93,4.78, body extent -2,-4.38 2,4.38, height 1.75
TSSOP-38 [mm] "THS4524"
  oval 1.75x0.3 smd: 1(-2.775,4.5) 2(-2.775,4) 3(-2.775,3.5) 4(-2.775,3) 5(-2.775,2.5) 6(-2.775,2) 7(-2.775,1.5) 8(-2.775,1) 9(-2.775,0.5) 10(-2.775,0) 11(-2.775,-0.5) 12(-2.775,-1) 13(-2.775,-1.5) 14(-2.775,-2) 15(-2.775,-2.5) 16(-2.775,-3) 17(-2.775,-3.5) 18(-2.775,-4) 19(-2.775,-4.5) 20(2.775,-4.5) 21(2.775,-4) 22(2.775,-3.5) 23(2.775,-3) 24(2.775,-2.5) 25(2.775,-2) 26(2.775,-1.5) 27(2.775,-1) 28(2.775,-0.5) 29(2.775,0) 30(2.775,0.5) 31(2.775,1) 32(2.775,1.5) 33(2.775,2) 34(2.775,2.5) 35(2.775,3) 36(2.775,3.5) 37(2.775,4) 38(2.775,4.5)
  silkscreen extent -3.83,-4.9 1.5,5.99, body extent -2.15,-4.9 2.15,4.9, height 1.2

## Part data
C26 C28 C29 C30 C34 C35 C36 C38 C43 C53: library part Capacitor
C39 C41 C61 C62 C63: library part "Cap Pol3", "Polarized Capacitor (Surface Mount)"
C45 C46 C47 C48 C49 C50 C51 C52: "COG Ceramic Cap -> near input to ads1178"
D1 D4 D5: library part ZENER, "2.5 volt ref"
D2 D3: "Reverse voltage protection diode"
NT1: library part NET_TIE
P1 P2: "Header, 4-Pin"
P3: "Header, 10-Pin, Female"
R1_1 R1_2 R2_1 R2_2 R3_1 R3_2 R4_1 R4_2 R5_1 R5_2 R6_1 R6_2 R7_1 R7_2 R8_1 R8_2 R9_1 R9_2 R10_1 R10_2 R11_1 R11_2 R12_1 R12_2 R13_1 R13_2 R14_1 R14_2 R15_1 R15_2 R16_1 R16_2 R17_1 R17_2 R18_1 R18_2 R19_1 R19_2 R20_1 R20_2 R21_1 R21_2 R22_1 R22_2 R23_1 R23_2 R24_1 R24_2 R25 R26 R27 R28 R29 R30 R31 R32 R33 R34 R35 R36 R43 R44: library part Res1, "Resistor"
T3 T7 T12 T13 T14 T15 T16 T17 T18 T19 T20 T21: library part TEST_PAD
U3: library part "5V Reg - MCP1791T-5002E/DC", "3.3V, 70mA LDO with SHDN and PWRGD pins"
U4: library part "5V Reg - MCP1791T-5002E/DC", "5V, 70mA LDO with SHDN and PWRGD pins"
U5: library part "1.8V Reg", "1.8V Reg. MCP1804"
U7 U9: library part "TI Small Op Amp"
U8: library part ADS1178, "The ADS1178 and 1278 are pin compatible. 16 and 24 bits, respectively."

## Free pads (board coordinates)
  round 96 hole 86: 0(100,100) 2(1900,1900) 3(100,1900)
  round 96 hole 86 mask+4: 1(1900,100)

## Via types
v1: diameter 25, hole 15, Top Layer to Bottom Layer, tented both sides, 165 vias
v2: diameter 25, hole 15, Top Layer to Bottom Layer, 31 vias
v3: diameter 50, hole 28, Top Layer to Bottom Layer, tented both sides, 7 vias
v4: diameter 50, hole 25, Top Layer to Bottom Layer, 6 vias
v5: diameter 35, hole 20, Top Layer to Bottom Layer, tented both sides, 4 vias
v6: diameter 50, hole 25, Top Layer to Bottom Layer, tented both sides, 3 vias
v7: diameter 35, hole 20, Top Layer to Bottom Layer, 2 vias
v8: diameter 40, hole 20, Top Layer to Bottom Layer, tented both sides, 1 vias

## Nets (pads, with @x,y where several pads share a name; then routed paths per layer and width w, separated by ;. In a path a pad name is that pad's centre, name@x,y a point inside that pad or via, vN(x,y) a via of type N, cw(c..) or ccw(c..) an arc to the next point about the centre after c; other vN are vias at no path point)
1.8V: C26.1 C58.1 C63.1 T11.0 U5.5 U8.26 | length 1141.2
  Top Layer w10: U8.26@1175,464.05 v1(1175,521) ; v1(1434,587.2) v1@1434.6,586.6 ; C26.1@1592.47,526 U5.5@1592.47,577.33 ; U5.5@1601.74,586.6 1556.84,631.5 1529.5,631.5 1512,649 1512,674 1555,717 1593,717 1632,756 1826,756 T11.0@1877,705
  Top Layer w20: v1@1434.6,586.6 U5.5@1601.74,586.6
  Bottom Layer w10: v1(1175,521) C58.1@1175,551.47 ; C63.1@1220.49,578.49 C63.1@1229,578.49 C63.1@1237.71,587.2
  Bottom Layer w20: C58.1@1175,551.47 1193.47,551.47 C63.1@1220.49,578.49 ; C63.1@1237.71,587.2 v1(1434,587.2)
2.5_REF1: C5_1.2 C13_1.1 C17_1.1 C60_1.1 D5.1 R5_1.1 R11_1.1 R17_1.1 R23_1.1 R36.2 | length 890.6
  Top Layer w10: D5.1@103.41,629.58 103.41,772.41 115.53,784.53 C17_1.1@115.53,945 138,945 148,935 R17_1.1@173.47,935 R17_1.1@177.47,935 ; R36.2@105,558.53 D5.1@105,627.99 ; C5_1.2@113.53,1188 R5_1.1@176.47,1188 ; C13_1.1@114.53,1057 139,1057 153,1043 R11_1.1@172.47,1043 ; C17_1.1@115.53,945 C5_1.2@115.5,1186.03 ; C60_1.1@115.53,829 127.53,817 R23_1.1@177.47,817
2.5_REF2: C5_2.2 C13_2.1 C17_2.1 C60_2.1 D4.1 R5_2.1 R11_2.1 R17_2.1 R23_2.1 R33.2 | length 954.5
  Top Layer w10: v1(1252.47,1638.53) R23_2.1@1288,1638.53 ; R23_2.1@1287,1639.53 C5_2.2@1287,1709.47 C13_2.1@1406,1709.47 ; R17_2.1@1406,1640.53 C13_2.1@1406,1709.47 ; R11_2.1@1514,1638.53 1514,1652 1529,1667 C17_2.1@1529,1709.47 ; R5_2.1@1658,1639.53 v2(1658,1675) ; C60_2.1@1658,1709.47 v2(1658,1675) ; C13_2.1@1406,1709.47 C17_2.1@1529,1709.47 ; C17_2.1@1529,1709.47 1597.53,1709.47 1632,1675 v2(1658,1675)
  Top Layer w12: v2(1764,1641) 1764.59,1641.59 D4.1@1819.58,1641.59
  Bottom Layer w12: v2(1658,1675) 1692,1641 v2(1764,1641) 1807.47,1641 R33.2@1827.47,1621
3.3V: C28.1 C33.1 C53.2 C59.1 C61.1 R28.1 R29.1 R33.1 T2.0 U3.4 U6.14 U6.15 U8.22 U8.23 U8.32 U8.34 U8.35 U8.36 U8.37 U8.38 U8.39 U8.40 U8.41 U8.42 Y1.1 Y1.4 | length 4993.1
  Top Layer w10: R29.1@919,1912.53 922.23,1909.3 1029.7,1909.3 ; U6.15@1040.2,1881.9 1040.2,1898.8 1029.7,1909.3 ; C33.1@1063.53,1939 C33.1@1066,1936.53 ; 1064.7,1909.3 1029.7,1909.3 ; 1096.21,405.7 U8.22@1096.21,464 1096.21,514.21 v1(1101,519) ; U8.23@1115.89,464 1115.89,421.42 C53.2@1077,382.53 1126.53,382.53 Y1.1@1126.53,326.45 ; U8.32@1293.06,464 1293.06,507.06 1314,528 1314,541 ; 1314.22,575.22 U8.35@1364.91,575.22 ; 1314.59,614.59 U8.37@1364.91,614.59 ; 1314.72,634.28 U8.38@1364.91,634.28 ; 1315.09,594.91 U8.36@1364.91,594.91 ; U8.40@1364.79,673.77 1314,673.77 ; U8.39@1364.91,653.96 1314,654 ; U8.34@1364.91,555.54 1328.54,555.54 1314,541 ; U8.42@1364.91,713.02 1403.51,713.02 1410.74,705.78 1412.74,705.78 1414.52,704 1404.3,693.78 1404.3,693.66 1403.97,693.33 U8.41@1364.91,693.33 1333.56,693.33 1314,673.77 ; R28.1@1491,258.47 1590.47,258.47 1605.53,273.53 U3.4@1605.53,318.64 ; 1314,541 1314,654 ; 1314,654 1314,673.77
  Top Layer w12: C33.1@1063.53,1939 1089.53,1965 1730,1965 1938,1757 1938,579 v3@1867,508 ; U8.32@1293.06,464 1317.06,440 v1(1329,440) ; C28.1@1605.53,396 C28.1@1605.53,414.47 ; T2.0@1872,884 1937,884
  Top Layer w20: U6.14@1066,1882.1 C33.1@1066,1936.53
  Top Layer w25: v1(1329,440) 1580,440 C28.1@1605.53,414.47 ; U3.4@1605.53,318.64 C28.1@1605.53,396 1639.53,430 v1(1656,430)
  Bottom Layer w10: C61.1@1059,578.49 C61.1@1069.51,578.49 ; 1096.53,551.47 C59.1@1116,551.47
  Bottom Layer w12: 1312,457 v1(1329,440) ; R33.1@1886.53,1621 v2(1937.53,1672)
  Bottom Layer w25: C61.1@1069.51,578.49 1096.53,551.47 ; C59.1@1116,551.47 1101,536.47 v1(1101,519) 1101,482 1126,457 1312,457 ; v1(1656,430) 1798,430 v3(1880,512)
5V: C11_1.1 C11_2.1 C12_1.1 C12_2.1 C14_1.1 C14_2.1 C15_1.1 C15_2.1 C16_1.1 C16_2.1 C19.1 C20.1 C22.1 C29.1 C38.2 C43.2 C54.1 C55.1 C56.1 C57.1 C62.1 P1.3 P2.3 R25.2 R26.2 R31.2 R36.1 T1.0 U1_1.20 U1_1.25 U1_1.30 U1_1.35 U1_2.20 U1_2.25 U1_2.30 U1_2.35 U2.A3 U2.E1 U2.E7 U4.4 U7.2 U8.5 U8.44 U8.53 U8.60 U9.2 U10.4 | length 10082.1
  Top Layer w10: v6@305,1849 308,1849 v6(313,1844) ; C20.1@408,1706.53 450,1706.53 ; v1(450,1736) 450,1706.53 ; v1(476,1012) 476,1011 478,1009 481,1012 481,1024 494.69,1037.69 U1_1.30@531.25,1037.69 ; v1(477,1139) 479.89,1136.11 U1_1.35@531.25,1136.11 695.02,1136.11 ; v1(478.3,928.12) 478.3,929.5 485.32,936.52 528.51,936.52 U1_1.25@531.25,939.26 564.02,939.26 580.72,922.55 580.72,908.74 587.17,902.3 692.47,902.3 697.27,897.5 720.13,897.5 745.13,872.5 755.73,872.5 778.23,850 v1(784,850) ; C43.2@516,1468.53 C43.2@516,1469.53 ; R25.2@516,1546.53 C43.2@516,1469.53 ; U2.E1@518.93,1717 U2.E1@515.52,1717 505.05,1706.53 450,1706.53 ; C19.1@532.53,1939 532.53,1914.47 578.51,1868.49 U2.A3@578.51,1842.98 U2.A3@578.51,1839.57 ; T1.0@605,298 v1(605,351) ; U9.2@661,1458.26 661,1480 v1(693.6,1512.6) 719.53,1538.53 R26.2@719.53,1551 740.53,1551 C22.1@808,1618.47 ; 661,1484 623.5,1521.5 567.97,1521.5 C43.2@516,1469.53 ; U2.E7@701.08,1717 U2.E7@704.5,1717 C22.1@803.02,1618.47 ; 801,710 831.47,710 C54.1@854,732.53 873.47,752 U8.5@925.54,752 ; U7.2@1021.26,1305 1021.79,1304.47 C38.2@1077,1304.47 1104.53,1304.47 v1(1134,1275) 1148,1261 ; v1(1076.52,849.52) U8.60@1076.52,902.98 1076.52,935.74 1085.7,944.92 1085.7,959.17 C56.1@1103,976.47 C56.1@1103,985.52 ; C57.1@1196,976.47 1214,958.47 1214,903.29 U8.53@1214.32,902.98 1214.32,861.68 v1(1229,849) ; v1@1315.61,752.39 U8.44@1364.91,752.39 ; U8.44@1366.29,751 1415.53,751 C55.1@1434,732.53 C55.1@1427.47,732.53 ; 1372.27,1088.5 1372.8,1088.5 1373.3,1089 1373.3,1228.83 1379.74,1235.28 1393.55,1235.28 1410.26,1251.98 U1_2.25@1410.26,1284.75 1407.52,1287.49 1407.52,1330.68 1400.5,1337.7 v1(1399.12,1337.7) ; v1(1483,1340) 1482,1340 1480,1338 1483,1335 1495,1335 1508.69,1321.31 U1_2.30@1508.69,1284.75 ; v1(1610,1339) 1607.11,1336.11 U1_2.35@1607.11,1284.75 1607.11,1120.98 1616,1112.09 ; v6@1727,913 v6(1728,913)
  Top Layer w12: U1_1.20@531.25,840.83 547.47,824.61 ; v4(759,699) v4@762,699 ; 1295.61,1268.53 U1_2.20@1311.83,1284.75
  Top Layer w20: v7@330,1534 v7(332,1534) ; v1(547.47,777.47) 547.47,824.61
  Top Layer w25: U4.4@295,318.11 295,396.47 C29.1@295.53,397 ; v1(1248.47,1268.53) 1295.61,1268.53
  Top Layer w30: v4@24,742 v4(35,742) ; v4(1424,927) v4(1493,996)
  Bottom Layer w10: v6(313,1844) v6@323,1844 ; v1(476,1012) 476,1011 478,1009 502,1009 ; v1(477,1139) 539.47,1139 C11_1.1@547.47,1131 ; v1@478.3,935.3 v1(478.3,928.12) 498.88,928.12 508,919 531.47,919 ; C16_1.1@548.47,1028 C16_1.1@547.47,1028 521,1028 502,1009 ; v1(743,1005) 734,996 515,996 502,1009 ; 1390,1284.53 1390,1308 1399.12,1317.12 v1(1399.12,1337.7) v1@1406.3,1337.7 ; 1467,1038 1467,1301 1480,1314 ; v1(1483,1340) 1482,1340 1480,1338 1480,1314 ; C16_2.1@1499,1267.53 C16_2.1@1499,1268.53 1499,1295 1480,1314 ; C11_2.1@1602,1268.53 1610,1276.53 v1(1610,1339)
  Bottom Layer w12: v2(957,1728) 968,1717 U10.4@968,1671.47
  Bottom Layer w20: v6@323,1844 431,1736 v1(450,1736) ; v7(332,1534) 375.5,1577.5 409.81,1577.5 416.31,1584 460,1584 v7(463,1587) ; C14_1.1@547.47,740 v1(547.47,777.47) C12_1.1@547.47,820 ; 1467,1038 v4@1509,996
  Bottom Layer w25: v1(531,692) 547.47,708.47 C14_1.1@547.47,740 ; v1(549,428) 605,372 v1(605,351) ; v1(693.6,1512.6) 787.21,1419 v1(800,1419) ; v1(763,1125) 763,1097 v1(829,1031) ; 801,833 v1(784,850) 839,905 v1(839,939) ; v1@1076.52,837.48 v1(1076.52,849.52) ; 1126.49,787.51 C62.1@1138.53,787.51 ; v1(1134,1275) 1140.47,1272.53 1211,1272.53 1211.42,1272.48 v1(1248.47,1268.53) C12_2.1@1291,1268.53 ; 1227,836 v1(1229,849)
  Bottom Layer w30: v4(35,742) 35,767.57 20.97,781.6 20.97,1307.97 v4(62,1349) ; 801,833 801,741 v4(759,699) 770,710 843,710 937,710 1014.51,787.51 1126.49,787.51 ; v1@1076.52,837.48 1126.49,787.51 ; v1(1148,1128) 1196,1128 1302,1022 ; 1227,836 1178.51,787.51 C62.1@1145.42,787.51 1126.49,787.51 ; v8@1329,1022 v4(1424,927) ; v4(1493,996) 1509,996 v6(1616,996) 1645,996 v6(1728,913)
  Bottom Layer w35: v6(313,1844) 444,1975 1401,1975 ; 1302,1022 v8(1324,1022) ; P1.3@1464,1912 1401,1975 ; v4(1882,1108) 1973.53,1199.53 1973.53,1341.53 1973.53,1565.54 1973.53,1686.91 1952.44,1708 1908,1708 1886,1730 1886,1801 1712,1975 1401,1975
  other v1: 1309,759
ADC_DRDY: P3.17 T21.0 U8.29 | length 813.8
  Top Layer w10: U8.29@1234,464 1234,423.63 1253,404.63 1253,339 1274.5,317.5 1283.73,317.5 1338,263.23 1338,121 v1(1341,118) ; 1254,375 1347,375 T21.0@1407,315
  Bottom Layer w10: P3.17@1225,63.34 1225,22 1231.08,15.92 1303.92,15.92 1341,53 v1(1341,118)
ADC_SYNC: P3.19 T20.0 U8.11 | length 1184.3
  Top Layer w10: T20.0@796,428 902,428 864,466 864,617 881.28,634.28 U8.11@925.93,634.28 ; v1(1296,344) 1364.5,275.5 1364.5,108.27 1323,66.77 v1(1315.77,66.77)
  Bottom Layer w10: v1(902,427) 902,418 973.03,346.97 1024.03,346.97 1027,344 v1(1296,344) ; P3.19@1275,63.34 P3.19@1278.43,63.34 ; P3.19@1278.43,66.77 v1(1315.77,66.77)